# EAGLE board Rocekt_test_stand (EAGLE 9.2.0)
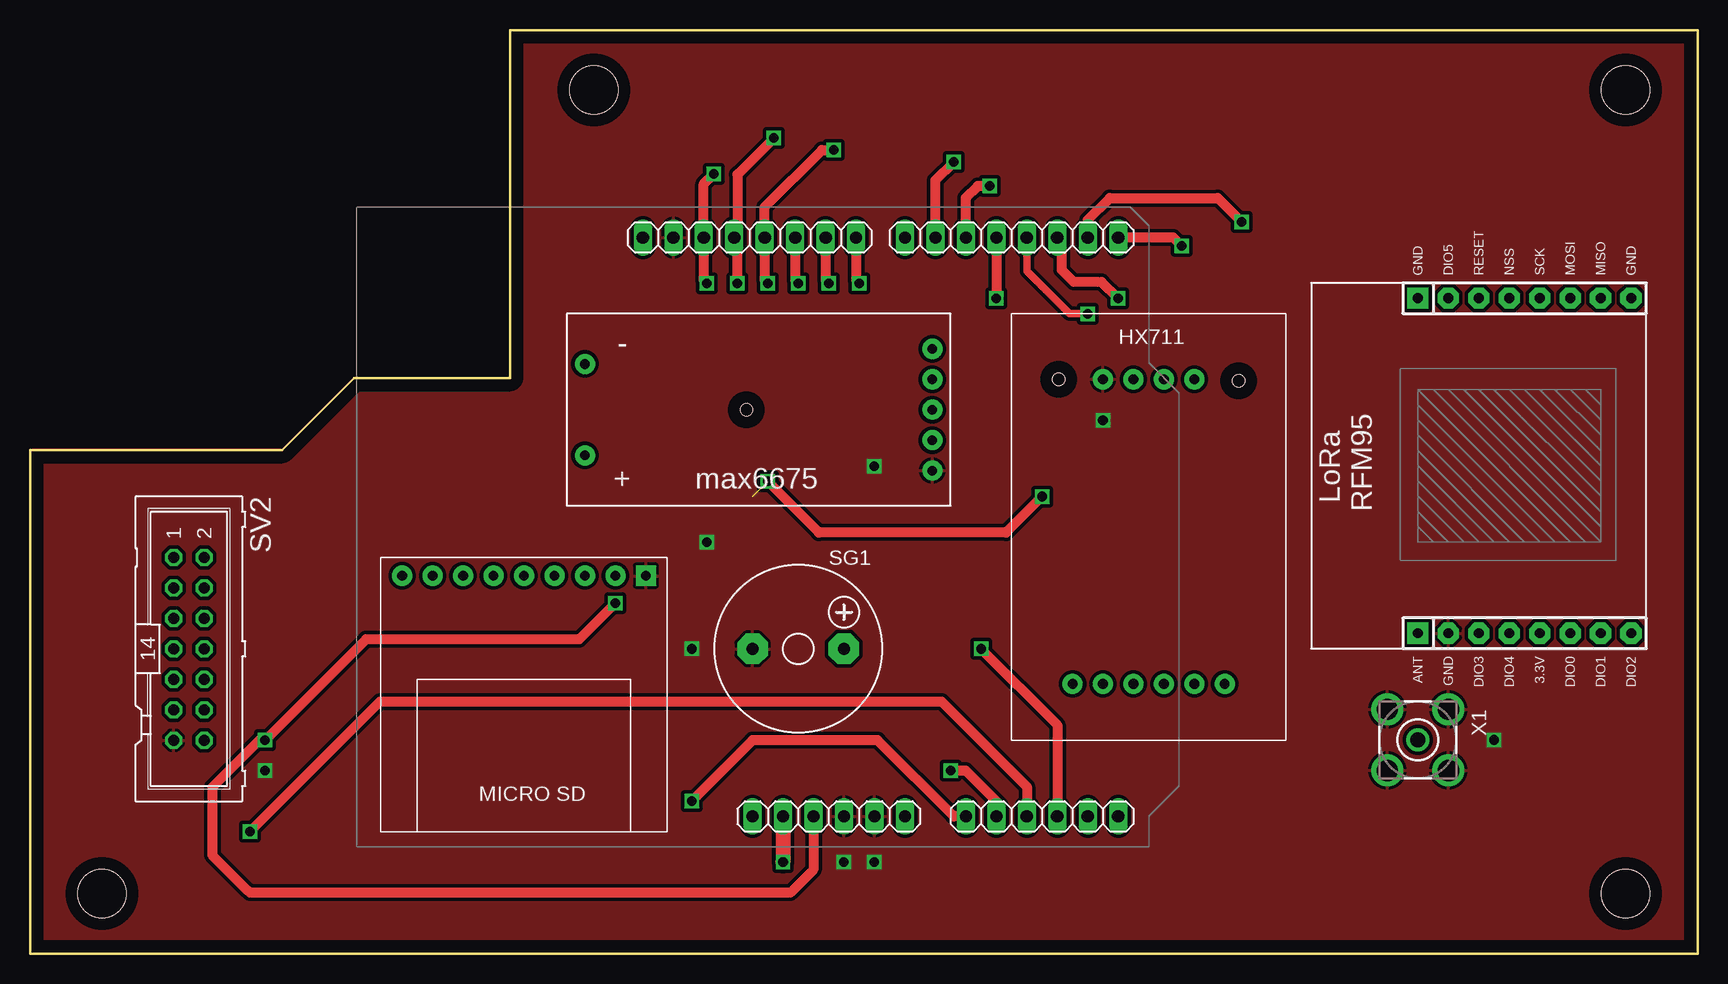
[diagram p0: board, top side]
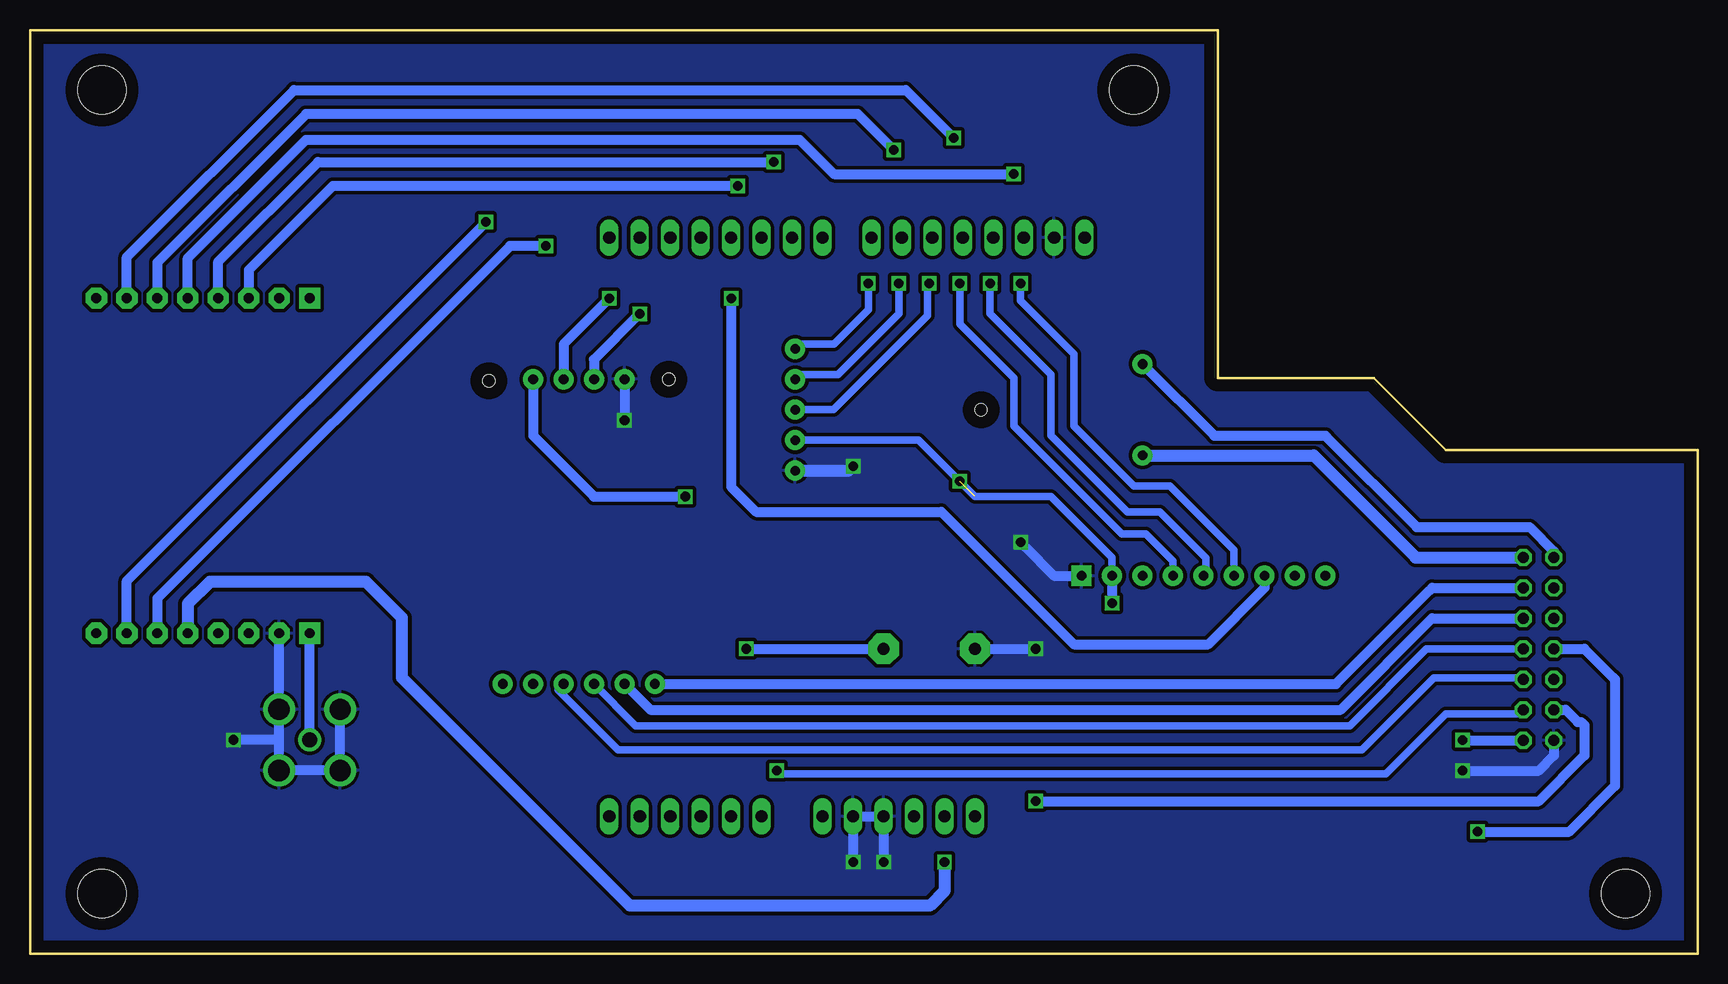
[diagram p1: board, bottom side, seen from below]

Size 139 x 77 mm. Coordinates in mm from the lower left corner, seen from the top.
Outline: 139,0 139,77 40,77 40,48 27,48 21,42 0,42 0,0 139,0
Copper layers (1*16): Top 0.035mm / dielectric 1.5mm / Bottom 0.035mm
Design rules "default": minimum track width 6mil, minimum drill 0.35mm, track to track 6mil, track to pad 6mil, pad to pad 6mil, via to via 6mil, smd to smd 6mil, copper to edge 40mil, drill to drill 6mil, minimum pad ring 10mil, minimum via ring 8mil, stop-mask expansion 4mil, vias tented up to drill 0mil, thermal gap 10mil
Holes 4 mm at 133,72 133,5 6,5 47,72

## Footprints (pad centres in the part's own frame; a part is rotated, then mirrored left to right if it is on the bottom)
ARDUINO2009 = drill 1.016 long: 1 33.02,2.54; 2 35.56,2.54; 3 38.1,2.54; 4 40.64,2.54; 5 43.18,2.54; 6 45.72,2.54; 7 50.8,2.54; 8 53.34,2.54; 9 55.88,2.54; 10 58.42,2.54; 11 60.96,2.54; 12 63.5,2.54; 13 63.5,50.8; 14 60.96,50.8; 15 58.42,50.8; 16 55.88,50.8; 17 53.34,50.8; 18 50.8,50.8; 19 48.26,50.8; 20 45.72,50.8; 21 41.656,50.8; 22 39.116,50.8; 23 36.576,50.8; 24 34.036,50.8; 25 31.496,50.8; 26 28.956,50.8; 27 26.416,50.8; 28 23.876,50.8
LORA_RFM95_ADAPTER = drill 0.813 pad 1.778 square: 1 -13.97,8.89; 9 13.97,8.89 | drill 0.813 pad 1.778 octagon: 2 -13.97,6.35; 3 -13.97,3.81; 4 -13.97,1.27; 5 -13.97,-1.27; 6 -13.97,-3.81; 7 -13.97,-6.35; 8 -13.97,-8.89; 10 13.97,6.35; 11 13.97,3.81; 12 13.97,1.27; 13 13.97,-1.27; 14 13.97,-3.81; 15 13.97,-6.35; 16 13.97,-8.89
MICRO_SD = drill 0.8 pad 1.676 square: P1 -9.906,10.16 | drill 0.8 pad 1.676: P2 -9.906,7.62; P3 -9.906,5.08; P4 -9.906,2.54; P5 -9.906,0; P6 -9.906,-2.54; P7 -9.906,-5.08; P8 -9.906,-7.62; P9 -9.906,-10.16
F/CM12P = drill 1.016 pad 2.54 octagon: + 3.81,0; - -3.81,0
ML14 = drill 0.914 octagon: 1 -7.62,-1.27; 2 -7.62,1.27; 3 -5.08,-1.27; 4 -5.08,1.27; 5 -2.54,-1.27; 6 -2.54,1.27; 7 0,-1.27; 8 0,1.27; 9 2.54,-1.27; 10 2.54,1.27; 11 5.08,-1.27; 12 5.08,1.27; 13 7.62,-1.27; 14 7.62,1.27
HX711 = drill 0.8 pad 1.676: A+ 1.27,-13.081; A- -1.27,-13.081; B+ 6.35,-13.081; B- 3.81,-13.081; DT -1.27,12.319; E+ -6.35,-13.081; E- -3.81,-13.081; GND -3.81,12.319; SCK 1.27,12.319; VCC 3.81,12.319 | hole 1: 7.493,12.192; -7.493,12.319
MAX6675_FOOTPRINT = drill 0.8 pad 1.676: + 30.48,11.811; - 30.48,4.191; CS 1.524,5.461; GND 1.524,13.081; SCK 1.524,8.001; SO 1.524,2.921; VCC 1.524,10.541 | hole 1: 17.018,8.001
BU-SMA-V = drill 1.27: 1 0,0 | drill 1.778: 2 -2.55,2.55; 3 2.55,2.55; 4 2.55,-2.55; 5 -2.55,-2.55

## Placement (x,y rotation side)
IC1  [ARDUINO2009]  27.21,8.89 0 top
LORA  LORA_RFM95_ADAPTERLORA_RFM95W  [LORA_RFM95_ADAPTER]  124.58,40.67 90 top
SD1  MICRO_SD  [MICRO_SD]  41.18,21.59 270 top
SG1  F/CM12P  [F/CM12P]  64.04,25.4 0 top
SV2  [ML14]  13.24,25.4 270 top
U$1  HX711  [HX711]  93.25,35.56 0 top
U$2  MAX6675  [MAX6675_FOOTPRINT]  76.74,53.34 180 top
X1  BU-SMA-V  [BU-SMA-V]  115.69,17.81 270 top

## Library data of the parts
IC1 = arduino
LORA = 111_LORA
SD1 = 111_microsd
SG1 = buzzer; OC_FARNELL: unknown; OC_NEWARK: unknown
SV2 = con-harting-ml; OC_FARNELL: unknown; OC_NEWARK: unknown
U$1 = 111_hx711
U$2 = 111_max6675
X1 = con-coax; OC_FARNELL: unknown; OC_NEWARK: unknown

## Nets
0: IC1.13 LORA.6
1: IC1.14 LORA.7
2: IC1.15 U$1.SCK
3: IC1.16 U$1.DT
4: IC1.17 SD1.P7
5: IC1.18 LORA.11
6: IC1.19 LORA.12
8: IC1.21 U$2.SO
9: IC1.22 U$2.CS
10: IC1.23 U$2.SCK
+3V3: IC1.2 LORA.5
+5V: IC1.3 SD1.P2 SV2.14 U$1.VCC U$2.VCC
A0: IC1.7 SV2.11
A1: IC1.8 SV2.12
A2: IC1.9 SV2.7
CLK: IC1.26 LORA.13 SD1.P6
GND: IC1.4 IC1.5 IC1.27 LORA.2 SD1.P1 SG1.- SV2.13 U$1.GND U$2.GND X1.2 X1.3 X1.4 X1.5
MISO: IC1.25 LORA.15 SD1.P5
MOSI: IC1.24 LORA.14 SD1.P4
N$1: SV2.2 U$2.+
N$2: IC1.10 SG1.+
N$3: SV2.1 U$2.-
N$4: SV2.4 U$1.E+
N$5: SV2.6 U$1.E-
N$6: SV2.8 U$1.A-
N$7: LORA.1 X1.1
N$12: SV2.10 U$1.A+

## Tracks (layer width: path | path; a pad name or v marks a point on that pad's centre or on a via)
0  (via drill 0.8)
  Top 0.813: IC1.13 95.31,59.69 v96,59
  Bottom 0.813: v96,59 99,59 128.39,29.61 LORA.6
1  (via drill 0.8)
  Top 0.813: v101,61 99,63 90,63 88.17,61.17 IC1.14
  Bottom 0.813: LORA.7 130.93,31.07 v101,61
2  (via drill 0.8)
  Top 0.61: 89.32,56 89,56
  Top 0.813: v90.71,54.61 89.32,56 | 89,56 87,56 86,57 86,59.32 IC1.15
  Bottom 0.813: U$1.SCK 94.52,50.8 v90.71,54.61
3  (via drill 0.8)
  Top 0.61: IC1.16 83.09,56.91 86.66,53.34 v88.17,53.34
  Bottom 0.813: v88.17,53.34 91.98,49.53 U$1.DT
4  (via drill 0.8)
  Top 0.813: IC1.17 v80.55,54.61
  Bottom 0.813: v80.55,54.61 80.55,38.91 78.47,36.83 63.04,36.83 52,25.79 40.79,25.79 36.1,30.48 SD1.P7
5  (via drill 0.8)
  Top 0.813: v80,64 79,64 78.01,63.01 IC1.18
  Bottom 0.813: v80,64 113.77,64 120.77,57 LORA.11
6  (via drill 0.8)
  Top 0.813: IC1.19 75.47,64.47 v77,66
  Bottom 0.813: LORA.12 123.31,57.69 115,66 v77,66
8  (via drill 0.8)
  Top 0.813: v69.12,55.88 68.87,56.13 IC1.21
  Bottom 0.254: U$2.SO 74.58,50.42
  Bottom 0.61: U$2.SO 74.83,50.8 72,50.8 69.12,53.68 v69.12,55.88
9  (via drill 0.8)
  Top 0.813: v66.58,55.88 66.33,56.13 IC1.22
  Bottom 0.61: U$2.CS 74.83,48.26 71.66,48.26 66.58,53.34 v66.58,55.88
10  (via drill 0.8)
  Top 0.813: v64.04,55.88 63.79,56.13 IC1.23
  Bottom 0.254: U$2.SCK 74.58,45.34
  Bottom 0.61: v64.04,55.88 64.19,55.73 64.19,53.19 72.04,45.34 U$2.SCK
+3V3  (via drill 0.8)
  Top 0.813: IC1.2 62.77,11
  Top 1.27: 62.77,11 v62.77,7.62
  Bottom 1.016: v62.77,7.62 62.77,5.23 64,4 89,4 108,23 108,28 111,31 124,31 125.85,29.15 LORA.5
+5V  (via drill 0.8)  (1 unrouted)
  Top 0.254: 18.32,5.08 18.2,5.2
  Top 0.813: v48.8,29.21 45.78,26.19 28,26.19 v19.59,17.78 19.11,17.78 15.2,13.87 15.2,8.2 18.2,5.2 | IC1.3 65.31,7 63.39,5.08 18.32,5.08 | v61.5,39.37 65.77,35.1 81.36,35.1 v84.36,38.1
  Bottom 0.61: U$2.VCC 64.93,42.8 60.23,38.1 53.88,38.1 48.8,33.02 SD1.P2
  Bottom 0.813: v19.59,17.78 SV2.14 | SD1.P2 v48.8,29.21 | v84.36,38.1 91.98,38.1 97.06,43.18 U$1.VCC
A0  (via drill 0.8)
  Top 0.305: 60.23,17.78 60.23,17.77 | 55.23,12.78 v55.15,12.7
  Top 0.813: IC1.7 77,11.43 70.65,17.78 60.23,17.78 | 60.23,17.77 55.23,12.78
  Bottom 0.305: v55.15,12.7 55,12.7
  Bottom 0.813: SV2.11 11,20.32 9.99,19.31 9.69,19.31 9.43,19.05 9.43,16.51 13.24,12.7 55,12.7
A1  (via drill 0.8)
  Top 0.406: 77,15.24 v76.74,15.24 | 78,15.24 78.01,15.24 78.12,15.12
  Top 0.813: IC1.8 80.55,12.7 78.12,15.12 | 78,15.24 77,15.24
  Bottom 0.61: SV2.12 14.83,20 21,20 26,15 76.5,15 v76.74,15.24
A2  (via drill 0.8)
  Top 0.813: IC1.9 83.09,13.91 76,21 29.16,21 v18.32,10.16
  Bottom 0.305: 6.89,14 6.89,13.97 | 7.01,22.98 6.89,22.86
  Bottom 0.813: SV2.7 9.43,25.4 7.01,22.98 | 6.89,22.86 6.89,14 | v18.32,10.16 10.7,10.16 6.89,13.97
CLK  (via drill 0.8)
  Top 0.813: v56.42,55.88 56.17,56.13 IC1.26 56.17,64.17 v57,65
  Bottom 0.61: SD1.P6 38.64,33.64 44,39 47,39 52,44 52,50 56.42,54.42 v56.42,55.88
  Bottom 0.813: LORA.13 125.85,58 116,67.85 74.85,67.85 72,65 v57,65
GND  (via drill 0.8)
  Bottom 0.305: X1.3 118.24,17.81 X1.2 | X1.2 | LORA.2 X1.2 | 89.44,45 v89.44,44.45 | 68,11.43 IC1.4 | v56.42,34.29 56.06,33.94 | 71,40.26 70.77,40.26
  Bottom 0.813: SV2.13 11.97,16.51 13.24,15.24 v19.59,15.24 | v67.85,7.62 IC1.4 IC1.5 v70.39,7.62 | 118.24,17.81 v122.04,17.81 | LORA.2 X1.3 X1.4 X1.5 | SD1.P1 53.63,31.5 56.06,33.94 | U$1.GND 89.44,45 | SG1.- v55.15,25.4
  Bottom 1.016: U$2.GND 71,40.26 | 70.77,40.26 v70.39,40.64
  pour Top (isolate 0.305): 40,77 139,77 139,0 1,0 0,0 0,42 21,42 27,48 40,48
  pour Bottom (isolate 0.305): 40,77 139,77 139,0 0,0 0,42 21,42 27,48 28,48 40,48
MISO  (via drill 0.8)
  Top 0.61: 59,65 59,61
  Top 0.813: v58.96,55.88 58.96,59.44 | 58.96,59.44 IC1.25 58.71,60.71 59,61 | v62,68 59,65 58.96,64.96 58.96,59.44
  Bottom 0.254: 53.88,43.18 53.85,43.15
  Bottom 0.61: 53.85,43.15 47.53,36.83 44.83,36.83 41,33 41,31.68 SD1.P5 | 53.88,43.18 53.88,48.26 58.96,53.34 v58.96,55.88
  Bottom 0.813: LORA.15 130.93,58.07 117,72 66,72 v62,68
MOSI  (via drill 0.8)
  Top 0.254: 61.5,59.44 IC1.24
  Top 0.406: IC1.24 61.25,59
  Top 0.813: 61.37,59.82 IC1.24 61.25,62.25 66,67 v67,67 | v61.5,55.88 61.25,56.13 61.25,59
  Bottom 0.61: SD1.P4 43.72,32.72 46,35 48,35 57,44 57,48 61.5,52.5 v61.5,55.88
  Bottom 0.813: v67,67 70,70 116,70 128.39,57.61 LORA.14
N$1
  Bottom 0.305: 15,33.02 SV2.2
  Bottom 1.016: U$2.+ 32,41.53 23.49,33.02 15,33.02
N$2  (via drill 0.8)
  Top 0.813: IC1.10 85.63,19.05 v79.28,25.4
  Bottom 0.305: 68,25.4 SG1.+
  Bottom 0.813: v79.28,25.4 68,25.4
N$3
  Bottom 0.305: 31.02,43.18 30.92,43.08
  Bottom 0.813: U$2.- 40.29,43.18 31.02,43.18 | 30.92,43.08 23.4,35.56 14,35.56 11.97,33.53 SV2.1
N$4
  Bottom 0.305: 22.3,30.3 22.13,30.48
  Bottom 0.813: 22.13,30.48 SV2.4 | 22.3,30.3 30.13,22.48 U$1.E+
N$5
  Bottom 0.305: 15,27.94 SV2.6
  Bottom 0.813: U$1.E- 87.28,20.32 29.75,20.32 22.13,27.94 15,27.94
N$6
  Bottom 0.61: U$1.A- 88.5,19 29,19 22.6,25.4 SV2.8
N$7
  Bottom 0.406: X1.1 115.69,18
  Bottom 0.813: 115.69,18 LORA.1
N$12
  Bottom 0.61: SV2.10 14.65,23 22,23 28,17 90,17 95,22 U$1.A+